# Altium PCB BarLed.PCBDOC
Units mm, origin at the board's own origin, x right, y up, seen from the top; angles counter-clockwise.
Board outline 299.72 x 199.9 mm, 2 copper layers (Top Layer, Bottom Layer); 19 components, 10 nets, 40 pads, 0 vias.
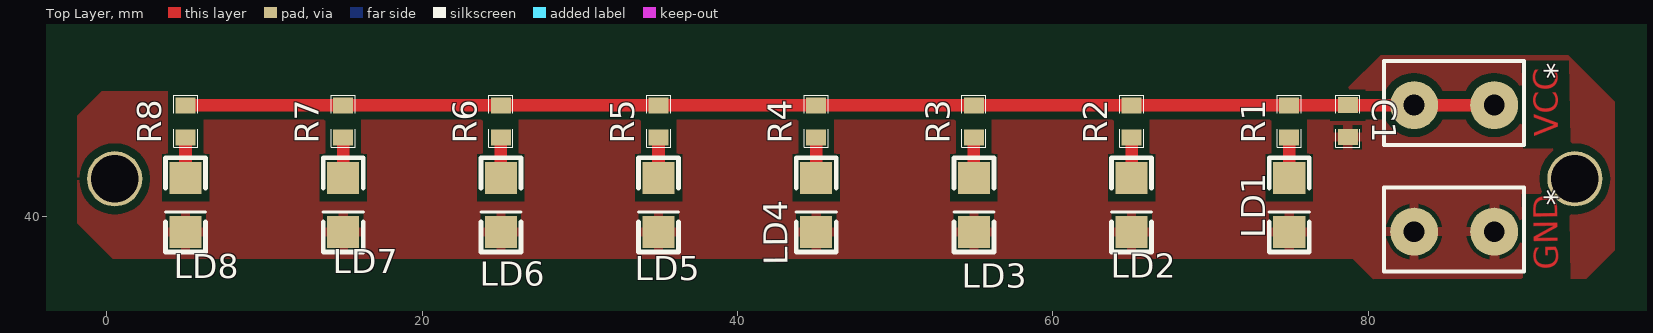
[diagram p0: Top Layer view]
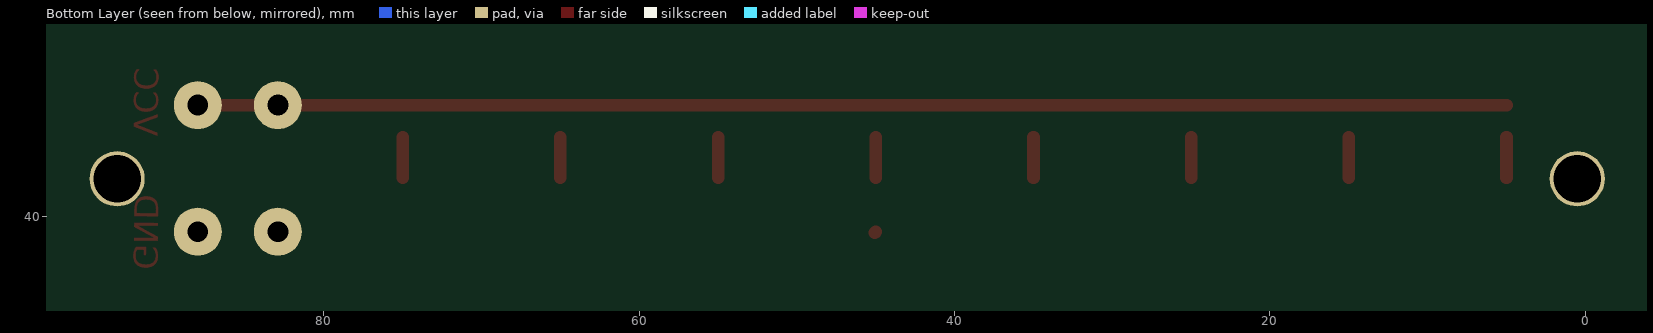
[diagram p1: Bottom Layer view, seen from below]

## Layer stack, top to bottom
Top Solder: solder mask 0.0102, Solder Resist, Dk 3.5
Top Layer: signal copper 0.0356
Dielectric1: dielectric 0.32, FR-4, Dk 4.8
Bottom Layer: signal copper 0.0356
Bottom Solder: solder mask 0.0102, Solder Resist, Dk 3.5

## Board outline
-141.655,-46.39 158.065,-46.39 158.065,153.508 -141.655,153.508

## Design rules (kind name [scope] priority, off if disabled: settings)
Clearance Clearance_bottom_polygon [OnLayer('Bottom Layer') Or OnLayer('Multi-Layer') vs OnLayer('Bottom Layer')  And  InPoly] p1: gap=0.508
Clearance Clearance_top_polygon [OnLayer('Top Layer')  Or OnLayer('Multi-Layer') vs OnLayer('Top Layer') And InPoly] p2: gap=0.508
Clearance Clearance_bottom [OnLayer('Bottom Layer') Or OnLayer('Multi-Layer') vs OnLayer('Bottom Layer')  And Not InPoly] p3: gap=0.203
Clearance Clearance_top [OnLayer('Top Layer')  Or OnLayer('Multi-Layer') vs OnLayer('Top Layer') And Not InPoly] p4: gap=0.203
Clearance Clearance_pad_to_pad [OnLayer('Multi-Layer') vs OnLayer('Multi-Layer')] p5: gap=0.254
ComponentClearance ComponentClearance_bottom [OnLayer('Bottom Overlay') vs OnLayer('Bottom Overlay')] p1: gap=0 collisioncheckmode=3 verticalgap=0.254 showdistances=FALSE
ComponentClearance ComponentClearance_top [OnLayer('Top Overlay') vs OnLayer('Top Overlay')] p2: gap=0 collisioncheckmode=3 verticalgap=0.254 showdistances=FALSE
FabricationTestPointUsage TestPointUsage [All] p1: valid=0 allowmultiple=FALSE
FabricationTestpoint Testpoint [All] p1: side=3 testpointundercomponent=TRUE minsize=1.016 maxsize=2.54 preferedsize=1.524 minholesize=0 maxholesize=1.016 preferedholesize=0.813 testpointgrid=0.025 allowsidetop=TRUE allowsidebottom=TRUE usegrid=TRUE gridtolerance=0
HoleSize [All] p1: absolutevalues=TRUE maxlimit=25.4 minlimit=0.406 maxpercent=80.000 minpercent=20.000
MinimumAnnularRing [PadXSize_AllLayers = PadYSize_AllLayers] p1: minimumring=0.254
PermittedLayers [All] p1: toplayerpermitted=TRUE bottomlayerpermitted=TRUE
PolygonConnect [All] p1: connectstyle=Relief reliefconductorwidth=0.61 reliefentries=4 polygonreliefangle="90 Angle" airgapwidth=0.254
RoutingVias [All] p1: holewidth=0.406 width=0.813 viastyle="Through Hole" minholewidth=0.4 minwidth=0.8 maxholewidth=0.6 maxwidth=10
SMDToPlane [All] p1: distance=0
SolderMaskExpansion [All] p1: expansion=0.102
ViasUnderSMD [All] p1: allowed=FALSE
Width Width_botom_top [OnLayer('Bottom Layer') or OnLayer('Top Layer')] p1: maxlimit=254 minlimit=0.254 preferedwidth=0.813 minimp=50.000000 maximp=50.000000 favimp=50.000000
26 further rules are at their usual default settings.

## Classes and differential pairs
component class BarLed: * C1 LD1 LD2 LD3 LD4 LD5 LD6 LD7 LD8 R1 R2 R3 R4 R5 R6 R7 R8

## Components (designator, comment, footprint, x,y, rotation, side; value= is the part's Value field where it differs from the comment)
* "Connector_Cosse" Connector_Cosse 88,39.014 r270 top
* "Connector_Cosse" Connector_Cosse 88,47.041 r270 top
C1 "CAP" 0805 78.715,47.041 r270 top
LD1 "comment" LED1206 75,39 r90 top
LD2 "comment" LED1206 65,39 r90 top
LD3 "comment" LED1206 55,39 r90 top
LD4 "comment" LED1206 45,39 r90 top
LD5 "comment" LED1206 35,39 r90 top
LD6 "comment" LED1206 25,39 r90 top
LD7 "comment" LED1206 15,39 r90 top
LD8 "comment" LED1206 5,39 r90 top
R1 "RES" 0805 75,45 r90 top
R2 "RES" 0805 65,45 r90 top
R3 "RES" 0805 55,45 r90 top
R4 "RES" 0805 45,45 r90 top
R5 "RES" 0805 35,45 r90 top
R6 "RES" 0805 25,45 r90 top
R7 "RES" 0805 15,45 r90 top
R8 "RES" 0805 5,45 r90 top

## Footprints (in the part's own frame and the unit in brackets; to place one, negate y for a bottom-side part, rotate by r counter-clockwise, add the part's x,y. Pads: shape width x height; smd on the part's side, far side on the other; paste and mask are expansions set on the pad)
0805 [mil]
  rect 40x50 smd: 1(0,0) 2(80,0)
  silkscreen extent -25,-30 105,30
Connector_Cosse [mil]
  round 120 hole 52.01: 1(0,0) 1(0,-200)
  silkscreen extent -110,-275 100,75
LED1206 [mil]
  rect 80x80 smd: A(135,0) K(0,0)
  silkscreen extent -50,-50 185,50

## Part data
C1: "capacité non polarisée"
LD1 LD2 LD3 LD4 LD5 LD6 LD7 LD8: library part LED, "LED 5mm/3mm/CMS"
R1 R2 R3 R4 R5 R6 R7 R8: "resistance"

## Free pads (board coordinates)
  round 3.5 hole 3: 0(0.508,42.367) 0(93.116,42.367)

## Nets (pads, with @x,y where several pads share a name; then routed paths per layer and width w, separated by ;. In a path a pad name is that pad's centre, name@x,y a point inside that pad or via, vN(x,y) a via of type N, cw(c..) or ccw(c..) an arc to the next point about the centre after c; other vN are vias at no path point)
GND: *.1@82.92,39.014 *.1@88,39.014 C1.2 LD1.K LD2.K LD3.K LD4.K LD5.K LD6.K LD7.K LD8.K | length 0.3
  Top Layer w0.8: LD4.K LD4.K@45.062,38.938 ; *.1@82.844,38.938 *.1@82.92,39.014
  Bottom Layer w0.8: *.1@82.844,38.938 *.1@82.92,39.014
NetLD1_A: LD1.A R1.1 | length 2.6
  Top Layer w0.8: LD1.A R1.1
NetLD2_A: LD2.A R2.1 | length 2.6
  Top Layer w0.8: LD2.A R2.1
NetLD3_A: LD3.A R3.1 | length 2.6
  Top Layer w0.8: LD3.A R3.1
NetLD4_A: LD4.A R4.1 | length 2.6
  Top Layer w0.8: LD4.A R4.1
NetLD5_A: LD5.A R5.1 | length 2.6
  Top Layer w0.8: LD5.A R5.1
NetLD6_A: LD6.A R6.1 | length 2.6
  Top Layer w0.8: LD6.A R6.1
NetLD7_A: LD7.A R7.1 | length 2.6
  Top Layer w0.8: LD7.A R7.1
NetLD8_A: LD8.A R8.1 | length 2.6
  Top Layer w0.8: LD8.A R8.1
VCC: *.1@82.92,47.041 *.1@88,47.041 C1.1 R1.2 R2.2 R3.2 R4.2 R5.2 R6.2 R7.2 R8.2 | length 83
  Top Layer w0.8: R8.2 5.009,47.041 82.92,47.041 *.1@88,47.041

## Polygon pours and split planes (outlines as drawn)
GND on Top Layer "Mechanical 1-No Net" (solid, pour order 5): 95.656,47.244 92.685,50.216 92.583,50.216 80.797,50.216 78.511,47.93 -0.33,47.93 -1.854,46.406 -1.88,46.38 -1.88,39.548 -1.854,39.548 0.356,37.338 0.381,37.313 78.994,37.313 79.019,37.313 80.34,35.992 80.366,36.017 93.777,36.017 93.828,36.017 95.656,37.846

## Keep-outs
Keep-Out Layer:
  rectangle: -135.695,152.27 149.305,157.27
  rectangle: 149.305,-37.73 154.305,157.27
  rectangle: -135.695,-42.73 154.305,-37.73
  rectangle: -140.695,-42.73 -135.695,157.27

## Other copper
Top Layer:
  text "VCC" at 92.075,45.06 h1.52 r90.77
  text "GND" at 92.075,36.601 h1.52 r90.77

## Silkscreen, mask and mechanical layers (free items; w line width, h text height)
Top Overlay:
  text "Les bandes en violet delimitent la surface utilisable...." at -144.907,179.832 h6.35
  text "Mais vous n'etes pas obliges de tout utiliser!!" at -128.651,169.545 h6.35
Mechanical 1:
  lines w0.254: -1.854,39.497 -1.854,46.431 -0.305,47.981 -0.254,47.981 3.785,47.981 78.511,47.981 80.772,50.241 90.043,50.241 92.608,50.241 95.656,47.193 95.656,37.871 93.802,36.017 90.119,36.017 80.34,36.017 79.019,37.338 3.658,37.338 0.305,37.338 -1.854,39.497